# EAGLE board power_board (EAGLE 7.1.0)
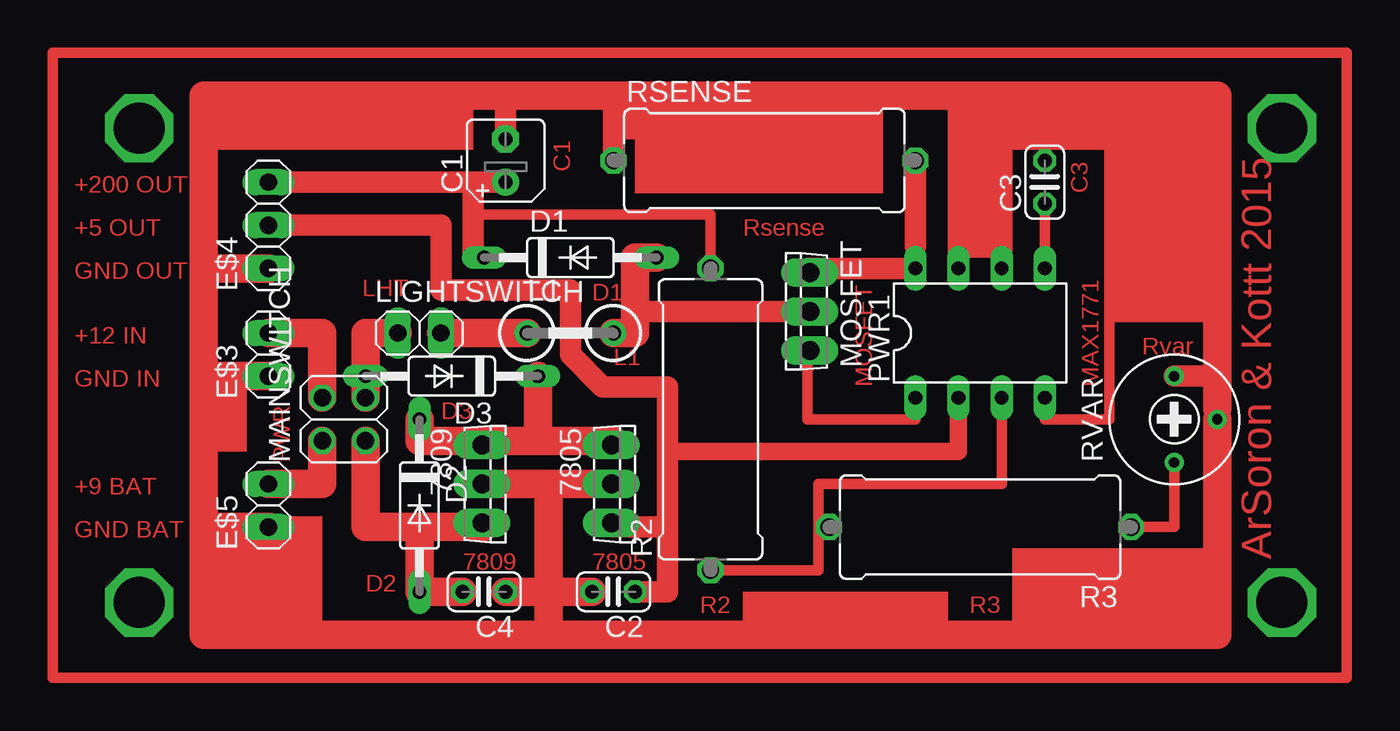
[diagram p0: board, top side]

No outline drawn. Coordinates in mm, seen from the top.
Copper layers (1*16): Top 0.035mm / dielectric 1.5mm / Bottom 0.035mm
Design rules "default": minimum track width 10mil, minimum drill 24mil, track to track 8mil, track to pad 8mil, pad to pad 8mil, via to via 8mil, smd to smd 8mil, copper to edge 40mil, drill to drill 8mil, minimum pad ring 10mil, minimum via ring 8mil, stop-mask expansion 4mil, vias tented up to drill 0mil, thermal gap 10mil

## Footprints (pad centres in the part's own frame; a part is rotated, then mirrored left to right if it is on the bottom)
C369-1 = drill 1.118 long: D 0,-1.397; G -2.286,-1.397; S 2.286,-1.397
B45181A = drill 0.813 pad 1.6: + -1.27,0 | drill 0.813 pad 1.6 octagon: - 1.27,0
C025-024X044 = drill 0.813 octagon: 1 -1.27,0; 2 1.27,0
C2992 = drill 0.813 long: A 5.08,0; C -5.08,0
1X02 = drill 1.016 long: 1 -1.27,0; 2 1.27,0
1X03 = drill 1.016 long: 1 -2.54,0; 2 0,0; 3 2.54,0
BL02RN2 = drill 0.9 pad 1.5: 1 -2.54,0; 2 2.54,0
2X02 = drill 1.016 octagon: 1 -1.27,-1.27; 2 -1.27,1.27; 3 1.27,-1.27; 4 1.27,1.27
DIL08 = drill 0.813 long: 1 -3.81,-3.81; 2 -1.27,-3.81; 3 1.27,-3.81; 4 3.81,-3.81; 5 3.81,3.81; 6 1.27,3.81; 7 -1.27,3.81; 8 -3.81,3.81
0617/17 = drill 1.016 octagon: 1 -8.89,0; 2 8.89,0
RTRIM3339P = drill 0.61: 1 -2.54,0; 2 0,-2.54; 3 2.54,0

## Placement (x,y rotation side)
7805  [C369-1]  19.05,48.26 270 top
7809  [C369-1]  11.43,48.26 270 top
C1  [B45181A]  11.43,67.31 90 top
C2  [C025-024X044]  17.78,41.91 180 top
C3  [C025-024X044]  43.18,66.04 90 top
C4  [C025-024X044]  10.16,41.91 180 top
D1  [C2992]  15.24,61.59 0 top
D2  [C2992]  6.35,46.99 270 top
D3  [C2992]  8.26,54.61 180 top
E$3  [1X02]  -2.54,55.88 90 top
E$4  [1X03]  -2.54,63.5 90 top
E$5  [1X02]  -2.54,46.99 90 top
L1  [BL02RN2]  15.24,57.15 0 top
LIGHTSWITCH  [1X02]  6.35,57.15 0 top
MAINSWITCH  [2X02]  1.91,52.07 90 top
MOSFET  [C369-1]  27.94,58.42 90 top
PWR1  MAX1771  [DIL08]  39.37,57.15 0 top
R2  [0617/17]  23.5,52.07 90 top
R3  [0617/17]  39.37,45.72 180 top
RSENSE  [0617/17]  26.67,67.31 0 top
RVAR  [RTRIM3339P]  50.8,52.07 90 top

## Library data of the parts
7805 7809 MOSFET = ref-packages
C1-C4 R2 R3 RSENSE = rcl
D1-D3 = diode
E$3-E$5 LIGHTSWITCH MAINSWITCH = pinhead
L1 = inductors
PWR1 = maxim
RVAR = resistor

## Nets
GND: PWR1.4 RVAR.2
S$5: PWR1.1
S$7: D2.C
S$9: D1.C
S$10: D1.A L1.2
S$11: R3.2

## Tracks (layer width: path | path; a pad name or v marks a point on that pad's centre or on a via)
GND
  Top 0.61: 46.99,71.12 46.99,52.07 43.18,52.07 PWR1.4 | 43.18,71.12 43.18,67.31
  Top 1.27: 38.1,60.96 38.1,71.12 | 40.64,60.96 40.64,71.12 | 17.78,71.12 17.78,67.31 | 11.43,71.12 11.43,68.58 | 53.34,54.61 50.8,54.61
  Top 1.676: -2.54,45.72 -6.35,45.72 | -2.54,54.61 -6.35,54.61 | -6.35,54.61 -6.35,60.96 | -6.35,60.96 -6.35,71.12 11.43,71.12 17.78,71.12 38.1,71.12 40.64,71.12 43.18,71.12 46.99,71.12 53.34,71.12 53.34,54.61 53.34,52.7 | -2.54,60.96 -6.35,60.96 | -6.35,45.72 -6.35,54.61 | -6.35,45.72 -6.35,39.37 13.97,39.37 | 17.78,48.26 13.97,48.26 | 13.97,48.26 10.16,48.26 | 13.97,39.37 13.97,41.91 | 13.97,41.91 13.97,48.26 | 13.97,39.37 53.34,39.37 RVAR.2 | 13.97,41.91 16.51,41.91 | 13.97,41.91 11.43,41.91
MAINSWITCH
  Top 1.676: 0.64,50.8 0.64,48.26 -2.54,48.26
S$1
  Top 1.676: 3.17,53.34 3.17,57.15 5.08,57.15
S$2
  Top 0.61: 43.18,60.96 43.18,64.77
S$3
  Top 1.27: 35.56,62.23 35.56,67.31
S$4
  Top 1.27: 29.21,60.96 35.56,60.96
S$5
  Top 0.61: 29.21,55.88 29.21,52.07 35.56,52.07 PWR1.1
S$6
  Top 1.676: 6.35,45.72 3.17,45.72 3.17,50.8 | 6.35,45.72 10.16,45.72 | 6.35,45.72 6.35,41.91
S$7
  Top 1.676: 10.16,50.8 6.35,50.8 D2.C
S$8
  Top 1.27: 11.43,66.04 -2.54,66.04
S$9
  Top 0.61: 9.53,64.14 23.5,64.14 23.5,60.96
  Top 1.27: 9.53,66.04 9.53,64.14 9.53,61.59 D1.C
S$10
  Top 1.27: 19.05,58.42 29.21,58.42
  Top 1.676: D1.A 19.05,61.59 19.05,58.42 19.05,57.15 L1.2
S$11
  Top 0.61: 23.5,43.18 29.84,43.18 29.84,45.72 | 29.84,45.72 29.84,48.26 40.64,48.26 40.64,53.34 | R3.2 29.84,45.72
S$12
  Top 0.61: 48.26,45.72 50.8,45.72 50.8,49.53
S$13
  Top 1.676: 13.34,54.61 13.34,51.44
S$14
  Top 1.016: 38.1,53.34 38.1,50.16 20.95,50.16
  Top 1.27: 20.95,45.72 20.95,50.16 20.95,53.98 17.14,53.98 15.24,55.88 15.24,59.69 7.62,59.69 7.62,63.5 -2.54,63.5 | 20.95,45.72 17.78,45.72 | 20.95,45.72 20.95,41.91 19.05,41.91
S$15
  Top 1.676: -2.54,57.15 0.64,57.15 0.64,53.34
S$16
  Top 1.676: 17.78,50.8 10.16,50.8
S$17
  Top 1.676: 7.62,57.15 12.7,57.15
S$18
  Top 1.676: 8.89,41.91 6.35,41.91
S$19
  Top 0.61: 60.96,73.66 -15.24,73.66 -15.24,36.83 60.96,36.83 60.96,73.66
S$20  (via drill 3)
  other vias: -10.16,69.22 -10.16,41.27 57.15,69.22 57.15,41.27
(copper drawn outside any net)
  shapes: Top area x10

## Text on the board
Top: C1 | +200 OUT | C3 | +5 OUT | Rsense | GND OUT | LHT | D1 | +12 IN | Rvar | L1 | GND IN | MOSFET | MAX1771 | D3 | PWR | +9 BAT | GND BAT | ArSoron & Kottt 2015 | 7809 | 7805 | D2 | R2 | R3